# Altium PCB cs301_YourGroupNumber.PcbDoc
Units mil, origin at the board's own origin, x right, y up, seen from the top; angles counter-clockwise.
Board outline 10825 x 6635 mil, 2 copper layers (Top Layer, Bottom Layer); 13 components, 95 nets, 86 pads, 0 vias.
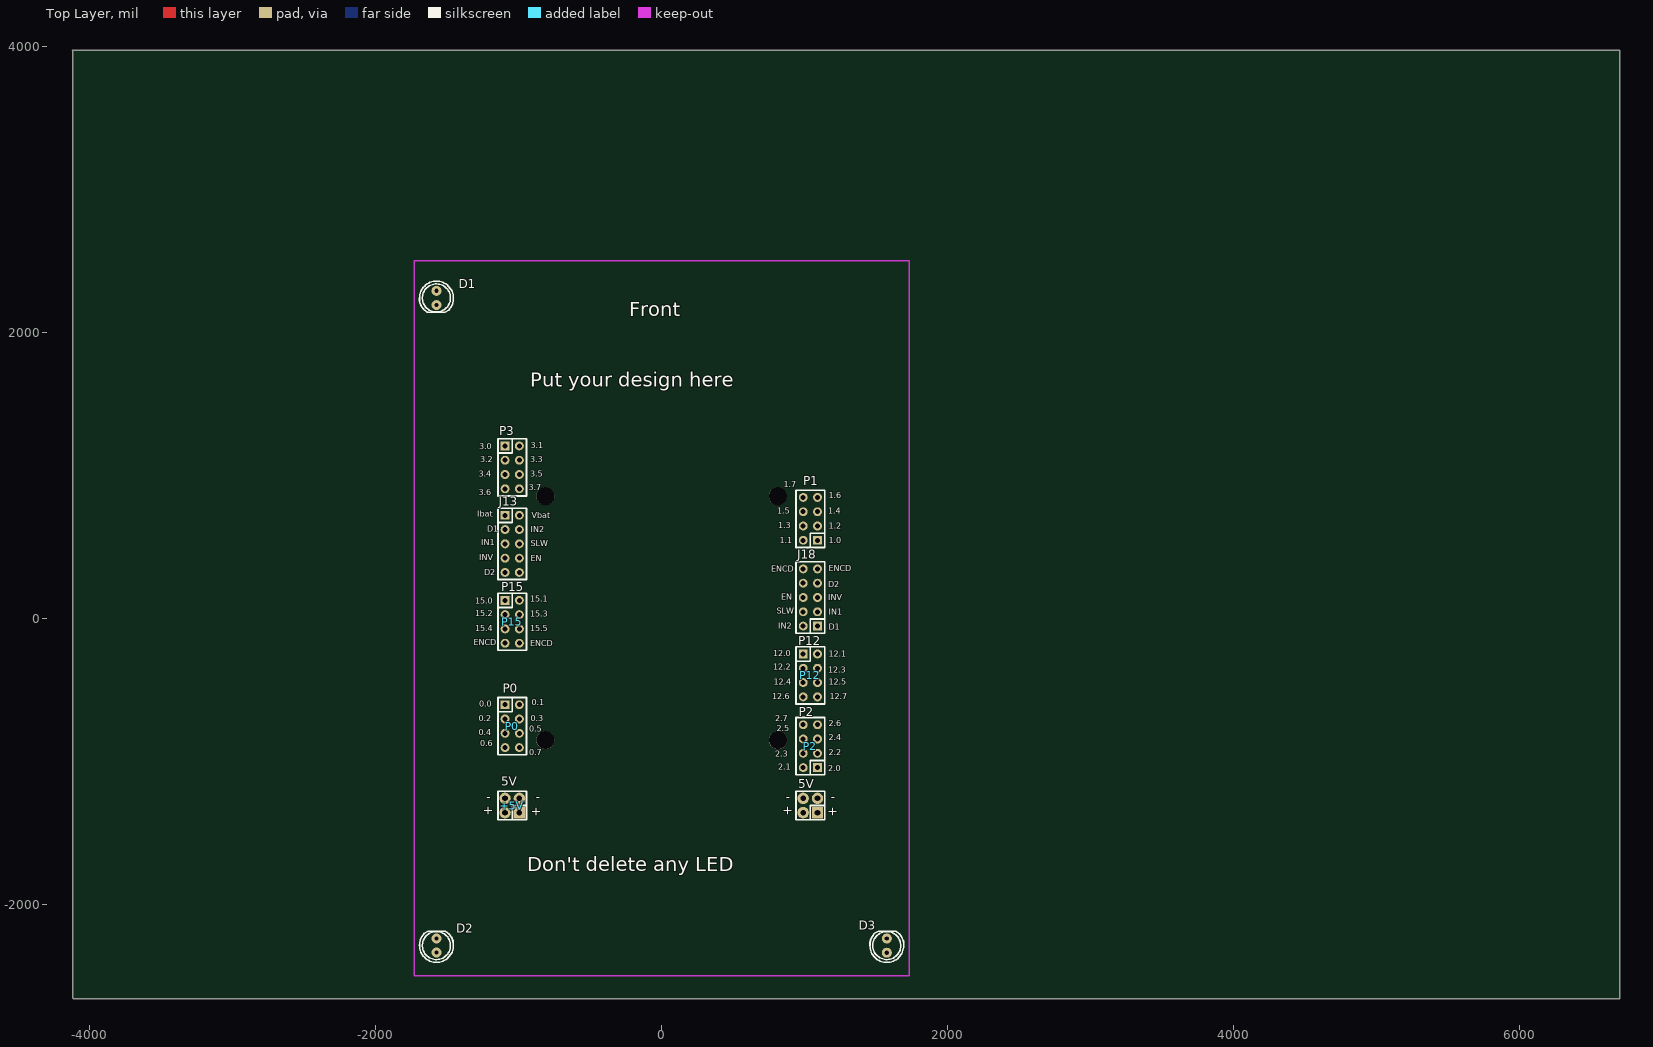
[diagram p0: Top Layer view]
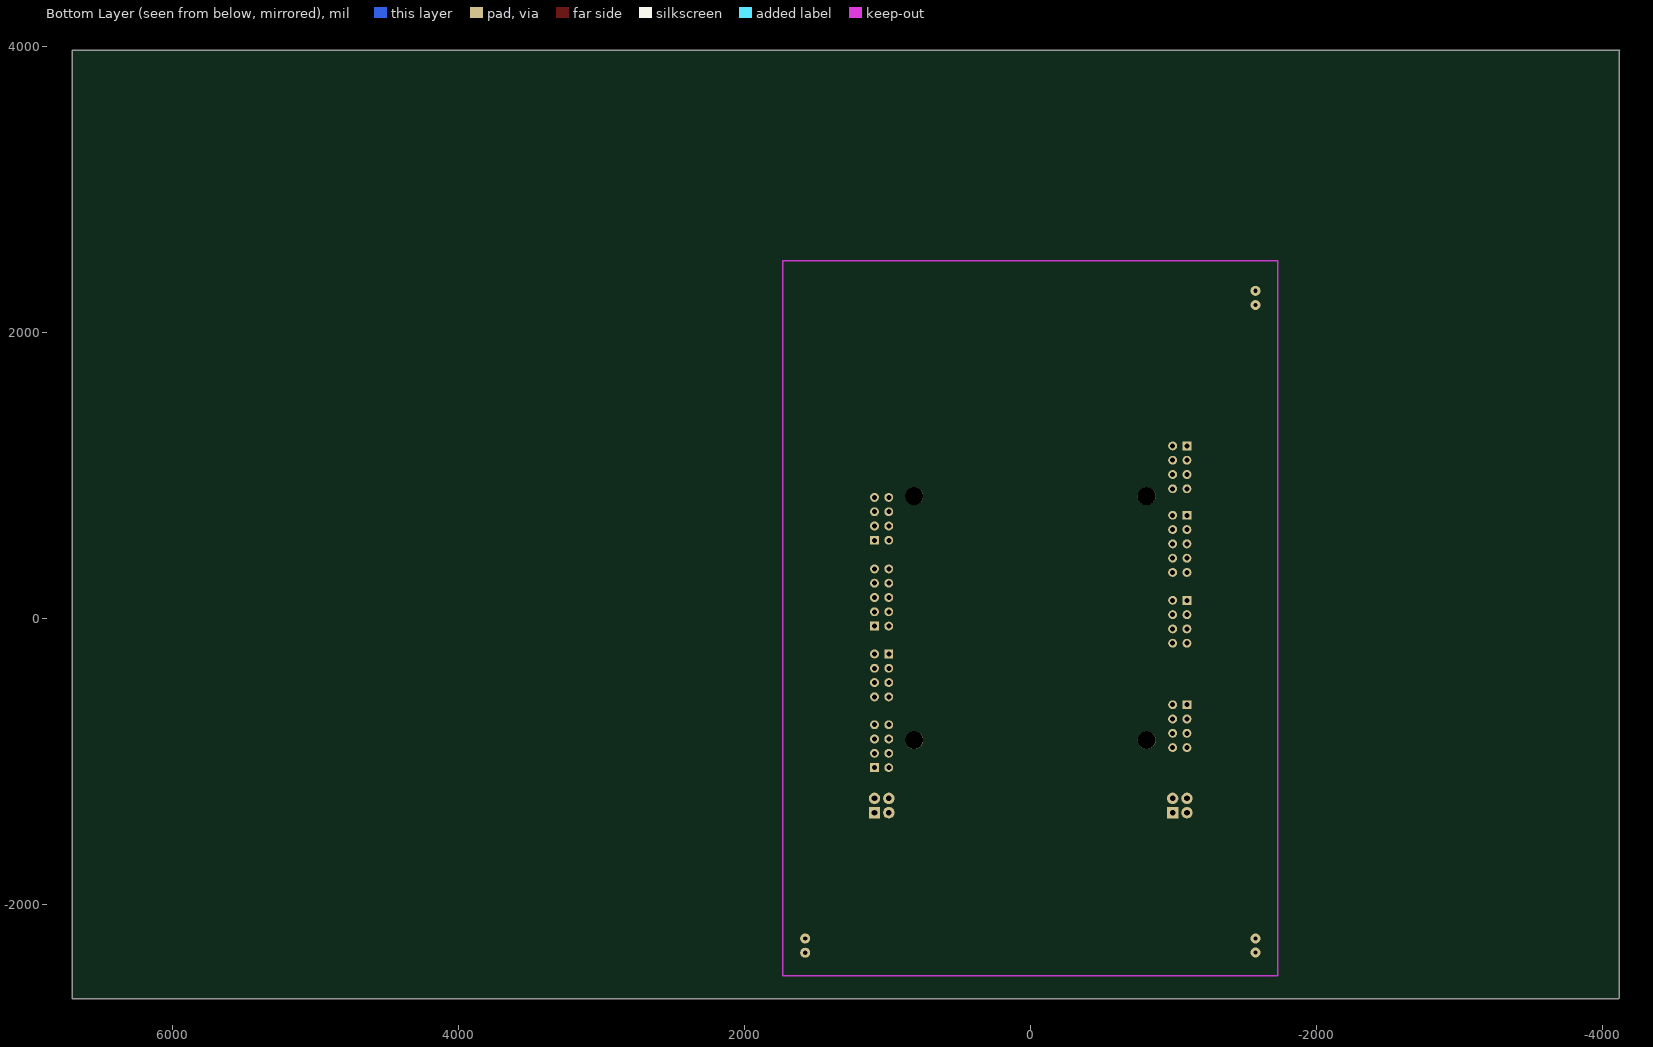
[diagram p1: Bottom Layer view, seen from below]

## Layer stack, top to bottom
Top Solder: solder mask 0.4, Solder Resist, Dk 3.5
Top Layer: signal copper 1.4
Dielectric1: dielectric 12.6, FR-4, Dk 4.8
Bottom Layer: signal copper 1.4
Bottom Solder: solder mask 0.4, Solder Resist, Dk 3.5

## Board outline
-4118.11,-2656.69 -4113.11,-2661.69 6701.89,-2661.69 6701.89,3973.31 -4123.11,3973.31 -4118.11,3968.31 -4118.11,-2656.69

## Design rules (kind name [scope] priority, off if disabled: settings)
Clearance [All] p1: gap=10
PolygonConnect [All] p1: connectstyle=Relief reliefconductorwidth=20 reliefentries=4 polygonreliefangle="90 Angle" airgapwidth=10
RoutingVias [All] p1: holewidth=28 width=50 viastyle="Through Hole" minholewidth=28 minwidth=50 maxholewidth=28 maxwidth=50
SilkToSolderMaskClearance SilkscreenOverComponentPads [IsPad] p1: minsilkscreentomaskgap=10 clearancetoexposedcopper=TRUE
SolderMaskExpansion [All] p1: expansion=4
UnpouredPolygon [All] p1: allowunpoured=FALSE
Width [All] p1: maxlimit=30 minlimit=10 preferedwidth=10 minimp=50.000000 maximp=50.000000 favimp=50.000000
28 further rules are at their usual default settings.

## Components (designator, comment, footprint, x,y, rotation, side; value= is the part's Value field where it differs from the comment)
5V "5V" IDC4 1090,-1360 r90 top locked
+5V "5V" IDC4 -995,-1360 r90 top locked
D1 "LED_S" LED0.1/5MM#1 -1574.8,2189.76 r180 top locked
D2 "LED_S" LED0.1/5MM#2 -1574.8,-2239.37 r0 top locked (schematic designator D4)
D3 "LED_S" LED0.1/5MM#1 1574.8,-2239.37 r0 top locked
J13 "CON10" IDC10 -1095,720 r270 top locked
J18 "CON10" IDC10 1090,-55 r90 top locked
P0 "P0" idc8 -1095,-605 r270 top locked
P1 "P1" idc8 1090,545 r90 top locked
P2 "P2" idc8 1090,-1045 r90 top locked
P3 "P3" idc8 -1095,1205 r270 top locked
P12 "P12" idc8 990,-250 r270 top locked
P15 "P15" IDC8 -1095,125 r270 top locked

## Footprints (in the part's own frame and the unit in brackets; to place one, negate y for a bottom-side part, rotate by r counter-clockwise, add the part's x,y. Pads: shape width x height; smd on the part's side, far side on the other; paste and mask are expansions set on the pad)
IDC4 [mil]
  rect 80x80 hole 40: 1(0,0)
  round 80 hole 40: 2(0,100) 3(100,0) 4(100,100)
  silkscreen extent -50,-50 150,150
idc8 [mil]
  rect 62x62 hole 35: 1(0,0)
  round 62 hole 35: 2(0,100) 3(100,0) 4(100,100) 5(200,0) 6(200,100) 7(300,0) 8(300,100)
  silkscreen extent -50,-50 350,150
IDC8 [mil]
  rect 62x62 hole 35: 1(0,0)
  round 62 hole 35: 2(0,100) 3(100,0) 4(100,100) 5(200,0) 6(200,100) 7(300,0) 8(300,100)
  silkscreen extent -50,-50 350,150
IDC10 [mil]
  rect 62x62 hole 35: 1(0,0)
  round 62 hole 35: 2(0,100) 3(100,0) 4(100,100) 5(200,0) 6(200,100) 7(300,0) 8(300,100) 9(400,0) 10(400,100)
  silkscreen extent -50,-50 450,150
LED0.1/5MM#1 [mil]
  round 70 hole 30: A(0,0) K(0,-100)
  silkscreen extent -118,-168 118,50
LED0.1/5MM#2 [mil]
  round 70 hole 30: A(0,0) K(0,-98.43)
  silkscreen extent -118,-168 118,50

## Part data
5V +5V: library part CON4, "Connector"
J13 J18: "Connector"
P0 P1 P2 P3: library part CON8, "Connector"
P12 P15: library part CON8_1, "Connector"

## Free pads (board coordinates)
  round 125.98 hole 125.98 unplated: 1(-813,-853) 1(-813,853) 1(813,-853) 1(813,853)

## Nets (pads, with @x,y where several pads share a name; then routed paths per layer and width w, separated by ;. In a path a pad name is that pad's centre, name@x,y a point inside that pad or via, vN(x,y) a via of type N, cw(c..) or ccw(c..) an arc to the next point about the centre after c; other vN are vias at no path point)
5V: 
GND: 
NetC2_1: 
NetC2_2: 
NetC3_1: 
NetC5_1: 
NetC5_2: 
NetC6_1: 
NetC8_1: 
NetC8_2: 
NetC9_1: 
NetC11_1: 
NetC11_2: 
NetC12_1: 
NetC14_1: 
NetC14_2: 
NetC15_1: 
NetC17_1: 
NetC17_2: 
NetC18_1: 
NetC20_1: 
NetC20_2: 
NetC21_1: 
NetC23_1: 
NetC23_2: 
NetC24_1: 
NetC26_1: 
NetC26_2: 
NetC27_1: 
NetC29_1: 
NetC29_2: 
NetC30_1: 
NetC32_1: 
NetC32_2: 
NetC33_1: 
NetC35_1: 
NetC35_2: 
NetC36_1: 
NetD1_A: 
NetD2_A: 
NetD3_A: 
NetD4_A: 
NetJ3_1: 
NetJ3_2: 
NetJ3_12: 
NetJ3_13: 
NetJ3_14: 
NetR2_2: 
NetR4_1: 
NetR5_2: 
NetR9_2: 
NetR11_1: 
NetR12_2: 
NetR16_2: 
NetR18_1: 
NetR19_2: 
NetR23_2: 
NetR25_1: 
NetR26_2: 
NetR30_2: 
NetR32_1: 
NetR33_2: 
NetR37_2: 
NetR39_1: 
NetR40_2: 
NetR44_2: 
NetR46_1: 
NetR47_2: 
NetR51_2: 
NetR53_1: 
NetR54_2: 
NetR58_2: 
NetR60_1: 
NetR61_2: 
NetR65_2: 
NetR67_1: 
NetR68_2: 
NetR72_2: 
NetR74_1: 
NetR75_2: 
NetR79_2: 
NetR81_1: 
NetR82_2: 
O1: 
O2: 
O3: 
O4: 
O5: 
O6: 
O7: 
O8: 
O9: 
O10: 
O11: 
O12: 
pads on no net: 5V.1 5V.2 5V.3 5V.4 +5V.1 +5V.2 +5V.3 +5V.4 D1.A D1.K D2.A D2.K D3.A D3.K J13.1 J13.2 J13.3 J13.4 J13.5 J13.6 J13.7 J13.8 J13.9 J13.10 J18.1 J18.2 J18.3 J18.4 J18.5 J18.6 J18.7 J18.8 J18.9 J18.10 P0.1 P0.2 P0.3 P0.4 P0.5 P0.6 P0.7 P0.8 P1.1 P1.2 P1.3 P1.4 P1.5 P1.6 P1.7 P1.8 P2.1 P2.2 P2.3 P2.4 P2.5 P2.6 P2.7 P2.8 P3.1 P3.2 P3.3 P3.4 P3.5 P3.6 P3.7 P3.8 P12.1 P12.2 P12.3 P12.4 P12.5 P12.6 P12.7 P12.8 P15.1 P15.2 P15.3 P15.4 P15.5 P15.6 P15.7 P15.8

## Keep-outs
Keep-Out Layer:
  lines w10: -1730,-2500 -1730,2500 1730,2500 1730,-2500 -1730,-2500

## Silkscreen, mask and mechanical layers (free items; w line width, h text height)
Top Overlay:
  text "Front" at -228.11,2113.31 h100
  text "Put your design here" at -920,1620 h100
  text "3.1" at -915,1190 h40
  text "3.0" at -1275,1180 h40
  text "3.2" at -1270,1090 h40
  text "3.3" at -920,1090 h40
  text "3.4" at -1280,990 h40
  text "3.5" at -920,990 h40
  text "1.7" at 855,915 h40
  text "3.7" at -930,895 h40
  text "3.6" at -1280,860 h40
  text "1.6" at 1170,840 h40
  text "1.5" at 810,730 h40
  text "1.4" at 1165,730 h40
  text "Ibat" at -1290,710 h40
  text "Vbat" at -910,700 h40
  text "1.3" at 815,630 h40
  text "1.2" at 1170,625 h40
  text "D1" at -1220,605 h40
  text "IN2" at -915,600 h40
  text "1.1" at 825,525 h40
  text "1.0" at 1170,525 h40
  text "IN1" at -1260,510 h40
  text "SLW" at -915,505 h40
  text "INV" at -1275,405 h40
  text "EN" at -915,400 h40
  text "ENCD" at 1170,330 h40
  text "ENCD" at 765,325 h40
  text "D2" at -1240,300 h40
  text "D2" at 1165,215 h40
  text "EN" at 835,130 h40
  text "INV" at 1165,125 h40
  text "15.1" at -920,115 h40
  text "15.0" at -1305,100 h40
  text "SLW" at 805,30 h40
  text "IN1" at 1170,25 h40
  text "15.2" at -1305,15 h40
  text "15.3" at -920,10 h40
  text "IN2" at 815,-75 h40
  text "D1" at 1170,-80 h40
  text "15.4" at -1305,-90 h40
  text "15.5" at -920,-90 h40
  text "ENCD" at -1315,-190 h40
  text "ENCD" at -920,-195 h40
  text "12.0" at 780,-265 h40
  text "12.1" at 1170,-270 h40
  text "12.2" at 780,-360 h40
  text "12.3" at 1165,-380 h40
  text "12.4" at 785,-465 h40
  text "12.5" at 1170,-465 h40
  text "12.6" at 775,-565 h40
  text "12.7" at 1175,-565 h40
  text "0.1" at -910,-610 h40
  text "0.0" at -1275,-620 h40
  text "0.2" at -1280,-720 h40
  text "0.3" at -915,-720 h40
  text "2.7" at 795,-720 h40
  text "2.6" at 1170,-755 h40
  text "2.5" at 805,-790 h40
  text "0.5" at -925,-795 h40
  text "0.4" at -1280,-820 h40
  text "2.4" at 1170,-855 h40
  text "0.6" at -1270,-895 h40
  text "0.7" at -925,-960 h40
  text "2.2" at 1170,-960 h40
  text "2.3" at 795,-970 h40
  text "2.1" at 815,-1060 h40
  text "2.0" at 1165,-1070 h40
  text "-" at -1195,-1230 h60 r180
  text "-" at -850,-1230 h60 r180
  text "-" at 900,-1230 h60 r180
  text "-" at 1215,-1230 h60 r180
  text "+" at -1185,-1380 h60 r90
  text "+" at 910,-1380 h60 r90
  text "+" at -850,-1390 h60 r90
  text "+" at 1225,-1390 h60 r90
  text "Don't delete any LED" at -940,-1770 h100